# Altium PCB PCB1.PcbDoc (part 1 of 2)
Units mm, origin at the board's own origin, x right, y up, seen from the top; angles counter-clockwise.
Board outline 50.96 x 22.34 mm, 2 copper layers (Top Layer, Bottom Layer), stack 0.771 mm thick; 54 components, 41 nets, 158 pads, 78 vias.
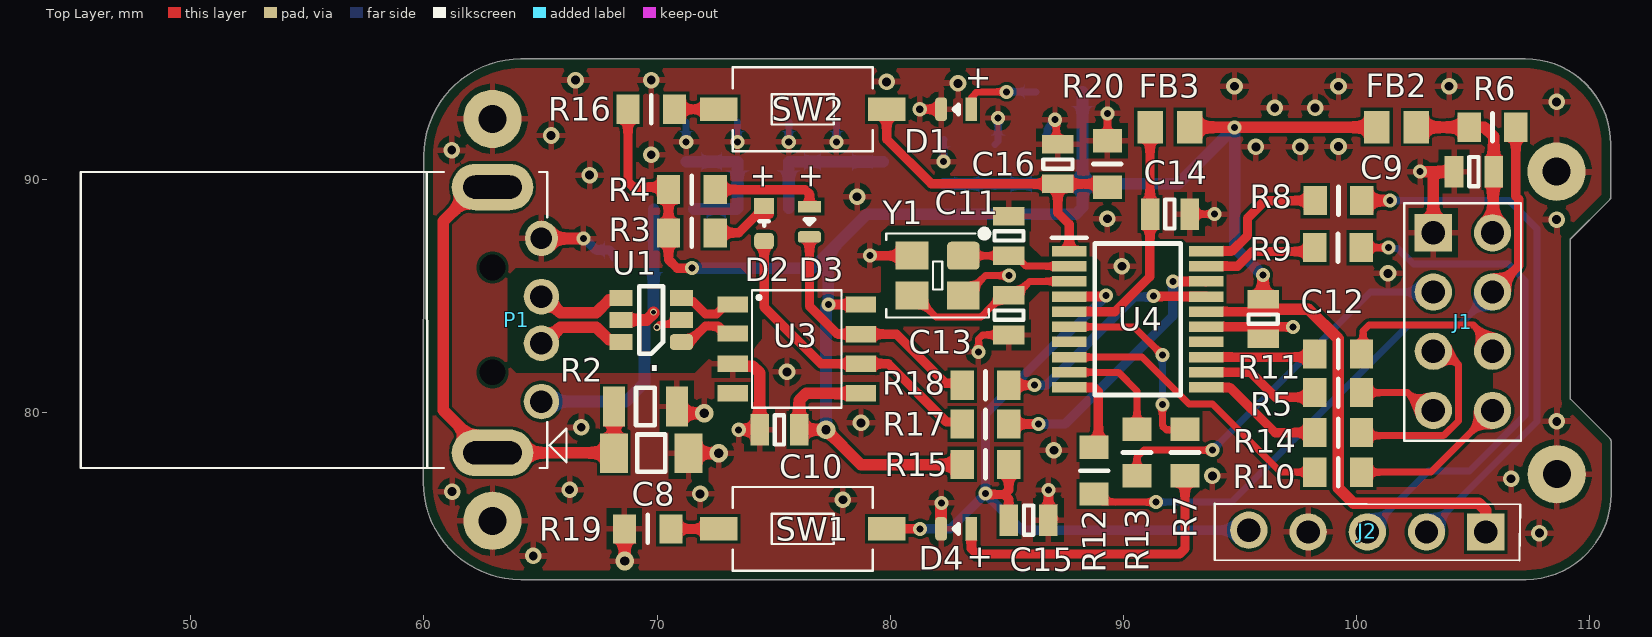
[diagram p0: Top Layer view]
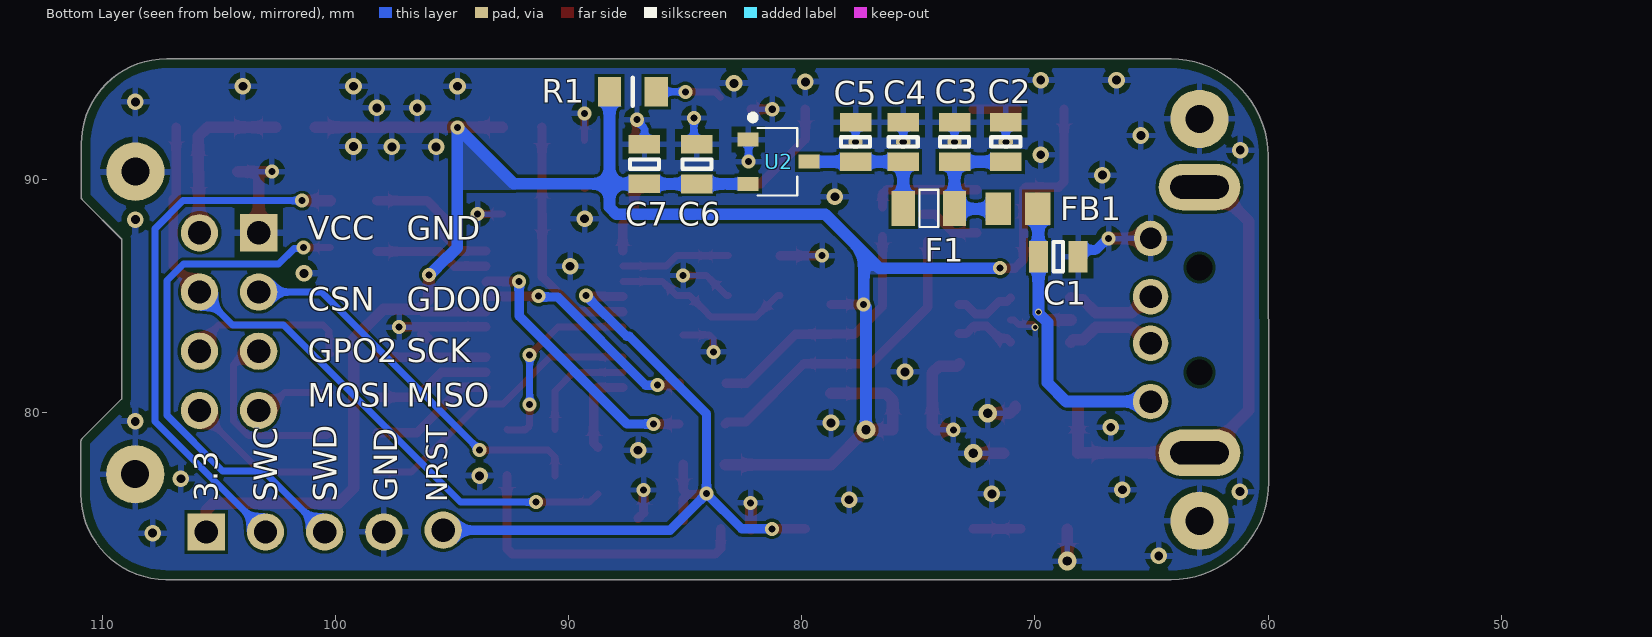
[diagram p1: Bottom Layer view, seen from below]

## Layer stack, top to bottom
Top Solder: solder mask 0.0102, Solder Resist, Dk 3.5
Top Layer: signal copper 0.0356
Dielectric 1: dielectric 0.7, FR-4, Dk 4.5
Bottom Layer: signal copper 0.0356
Bottom Solder: solder mask 0.0102, Solder Resist, Dk 3.5

## Board outline
64.147,72.823 cw(c64.147,77) 59.97,77 60.002,91 cw(c64.167,91) 64.167,95.165 107.247,95.165 cw(c107.247,91.502) 110.911,91.502 110.914,89.238 cw(c110.736,89.238) 110.862,89.113 109.173,87.421 109.181,80.568 110.873,78.879 cw(c110.748,78.754) 110.925,78.754 110.927,76.537 110.931,76.504 cw(c107.253,76.504) 107.292,72.827 107.253,72.823

## Design rules (kind name [scope] priority, off if disabled: settings)
BoardOutlineClearance [All] p1: gap=0.4 ignorepadtopadclearanceinfootprint=FALSE
Clearance Clearance_1 [All] p1: gap=0.127 ignorepadtopadclearanceinfootprint=FALSE
DiffPairsRouting [All] p1: maxlimit=0.254 minlimit=0.127 mostfreqgap=0.127 toplayer_minwidth=0.3 toplayer_maxwidth=0.665 toplayer_prefwidth=0.5 bottomlayer_minwidth=0.3 bottomlayer_maxwidth=0.665 bottomlayer_prefwidth=0.5 maxuncoupledlength=12.7
HoleSize [All] p1: absolutevalues=TRUE maxlimit=6.8 minlimit=0.15 maxpercent=80.000 minpercent=20.000
HoleToHoleClearance HoleToHole_Vias [IsVia vs IsVia] p1: gap=0.2 allowstackedmicrovias=TRUE
HoleToHoleClearance HoleToHole_Pads [All] p2: gap=0.45 allowstackedmicrovias=TRUE
MinimumSolderMaskSliver [All] p1: minsoldermaskwidth=0.1
PolygonConnect [All] p1: connectstyle=Relief reliefconductorwidth=0.254 reliefentries=4 polygonreliefangle="90 Angle" airgapwidth=0.254
RoutingVias [All] p1: holewidth=0.4 width=0.8 viastyle="Through Hole" minholewidth=0.3 minwidth=0.6 maxholewidth=2 maxwidth=4
SilkToSolderMaskClearance [IsPad] p1: minsilkscreentomaskgap=0.1 clearancetoexposedcopper=TRUE
SolderMaskExpansion [All] p1: expansion=0.1 istentingtop=FALSE
SupplyNets "Schematic Supply Nets_3" [InNet('+5V')] p1: voltage=0.000
SupplyNets "Schematic Supply Nets_2" [InNet('+3.3V')] p2: voltage=0.000
SupplyNets "Schematic Supply Nets_1" [InNet('+3.3V_RF')] p3: voltage=0.000
SupplyNets "Schematic Supply Nets" [InNet('GND')] p4: voltage=0.000
Width [All] p1: maxlimit=2 minlimit=0.127 preferedwidth=0.254
25 further rules are at their usual default settings.

## Classes and differential pairs
differential pair D: +D_P -D_N

## Components (designator, comment, footprint, x,y, rotation, side; value= is the part's Value field where it differs from the comment)
C1 "10nF" C_0805 69,86.675 r180 bottom
C2 "0.1 uF" C_0805 71.25,91.6 r90 bottom
C3 "4.7uF" C_0805 73.45,91.6 r90 bottom
C4 "10uF" C_0805 75.65,91.6 r90 bottom
C5 "0.1 uF" C_0805 77.695,91.6 r90 bottom
C6 "0.1 uF" C_0805 84.5,90.647 r90 bottom
C7 "10uF" C_0805 86.75,90.65 r90 bottom
C8 "10nF" C_1206 69.75,78.25 r0 top
C9 "0.1 uF" C_0805 105.04,90.325 r180 top
C10 "0.1 uF" C_0805 75.25,79.25 r180 top
C11 "18pF" C_0805 85.096,87.568 r90 top
C12 "0.1 uF" C_0805 96,84 r90 top
C13 "18pF" C_0805 85.096,84.168 r270 top
C14 "0.1 uF" C_0805 92,88.505 r0 top
C15 "0.1 uF" C_0805 85.938,75.375 r0 top
C16 "0.1 uF" C_0805 87.192,90.65 r90 top
D1 "KT-0603G" D_LED_SMD_0603_GREEN 82.833,93 r180 top
D2 "KT-0603R" D_LED_SMD_0603_RED 74.593,88.1 r270 top
D3 "KT-0603G" D_LED_SMD_0603_GREEN 76.537,88.175 r270 top
D4 "KT-0603Y" D_LED_SMD_0603_YELLOW 82.833,75 r180 top
F1 "SMD0805-050-16V" F_0805 74.55,88.75 r0 bottom
FB1 "BLM21PG601SN1D" FB_0805 70.725,88.725 r0 bottom
FB2 "BLM21PG601SN1D" FB_0805 101.724,92.232 r0 top
FB3 "BLM21PG601SN1D" FB_0805 92,92.232 r180 top
J1 "DS1023-2*4SF11" "СС1101_Header 4X2" 103.3,87.7 r0 top
J2 "BOOMELE(Boom Precision Elec)" SWD_Header_Connector_5pos_Female 105.548,74.868 r0 top
P1 "CONN PLUG USB2.0 TYPEA 4POS R/A" "USB-A (USB TYPE-A)" 65.041,83.962 r270 top
R1 "220R" Res_0805 87.25,93.75 r180 bottom
R2 "1M" RES_1206 69.5,80.25 r0 top
R3 "1k" Res_0805 71.492,87.7 r0 top
R4 "1k" Res_0805 71.492,89.553 r0 top
R5 "47R" Res_0805 99.216,80.843 r180 top
R6 "10k" Res_0805 105.84,92.232 r180 top
R7 "220R" Res_0805 92.645,78.273 r270 top
R8 "100R" Res_0805 99.232,89.083 r0 top
R9 "100R" Res_0805 99.214,87.064 r0 top
R10 "100R" Res_0805 99.216,77.432 r180 top
R11 "47R" Res_0805 99.216,82.5 r0 top
R12 "47R" Res_0805 88.75,77.5 r270 top
R13 "100R" Res_0805 90.589,78.273 r90 top
R14 "47R" Res_0805 99.216,79.129 r0 top
R15 "10k" Res_0805 84.088,77.768 r0 top
R16 "220R" Res_0805 69.75,93 r0 top
R17 "100R" Res_0805 84.088,79.5 r180 top
R18 "100R" Res_0805 84.088,81.162 r180 top
R19 "220R" Res_0805 69.6,75 r180 top
R20 "10k" Res_0805 89.318,90.65 r90 top
SW1 "TSA363G25-250B" "SW_BRIGHT TSA363G25-250B" 76.25,75 r0 top
SW2 "TSA363G25-250B" "SW_BRIGHT TSA363G25-250B" 76.25,93 r0 top
U1 "USBLC6-2SC6" U_SOT23-6-292X160X125-95P-SGMICRO 69.75,83.962 r180 top
U2 "XC6206P332MR-G" SOT-23_XC6206P332MR-G 81,90.75 r270 bottom
U3 "CH340N" U_CH340N_SOP-8 76,82.717 r0 top
U4 "STM32F030F4P6" SOP65P640X120-20N 90.619,83.993 r0 top
Y1 "8MHZ" SMD-3225 82.039,85.868 r180 top

## Footprints (in the part's own frame and the unit in brackets; to place one, negate y for a bottom-side part, rotate by r counter-clockwise, add the part's x,y. Pads: shape width x height; smd on the part's side, far side on the other; paste and mask are expansions set on the pad)
C_0805 [mm]
  rect 0.8x1.35 smd: 1(-0.85,0) 2(0.85,0)
  silkscreen extent -0.2,-0.63 0.2,0.63, body extent -1,-0.63 1,0.63, height 1.8
C_1206 [mm]
  rect 1.2x1.7 smd: 1(-1.6,0) 2(1.6,0)
  silkscreen extent -0.6,-0.8 0.6,0.8, body extent -1.6,-0.8 1.6,0.8, height 2.2
D_LED_SMD_0603_GREEN [mm] "MEIHUA"
  rrect50% 0.5x1 smd: 1(0.65,0)
  rect 0.5x1 smd: 2(-0.65,0)
  silkscreen extent -0.1,-0.2 0.1,0.2, body extent -0.8,-0.4 0.8,0.4, height 0.6
D_LED_SMD_0603_RED [mm] "KT-0603R"
  rrect50% 0.7x0.85 smd: 1(0.75,0)
  rect 0.7x0.85 smd: 2(-0.75,0)
  silkscreen extent -0.1,-0.2 0.1,0.2, body extent -0.8,-0.4 0.8,0.4, height 0.6
D_LED_SMD_0603_YELLOW [mm] "MEIHUA"
  rrect50% 0.5x1 smd: 1(0.65,0)
  rect 0.5x1 smd: 2(-0.65,0)
  silkscreen extent -0.1,-0.2 0.1,0.2, body extent -0.8,-0.4 0.8,0.4, height 0.6
F_0805 [mm] "Fuse 0805"
  rect 1x1.5 smd: 1(-1.1,0) 2(1.1,0)
  silkscreen extent -0.4,-0.8 0.4,0.8, body extent -1.1,-0.77 1.1,0.77, height 0.5
FB_0805 [mm]
  rect 1.1x1.4 smd: 1(-0.85,0) 2(0.85,0)
  body extent -1.03,-0.6 0.97,0.6, height 0.9
Res_0805 [mm]
  rect 1x1.25 smd: 1(-1,0) 2(1,0)
  silkscreen extent 0,-0.6 0,0.6, body extent -1,-0.63 1,0.63, height 0.61
RES_1206 [mm] "Chip resistor 1206"
  rect 0.95x1.7 smd: 1(-1.35,0) 2(1.35,0)
  silkscreen extent -0.4,-0.8 0.4,0.8, body extent -1.6,-0.8 1.6,0.8, height 1
SMD-3225 [mm]
  rrect30% 1.4x1.2 smd: 1(-1.1,-0.85)
  rect 1.4x1.2 smd: 2(1.1,-0.85) 3(1.1,0.85) 4(-1.1,0.85)
  silkscreen extent -2.2,-1.95 2.2,1.8, body extent -1.65,-1.3 1.65,1.3, height 0.81
SOP65P640X120-20N [mm]
  rect 1.475x0.45 smd: 1(-2.938,2.925) 2(-2.938,2.275) 3(-2.938,1.625) 4(-2.938,0.975) 5(-2.938,0.325) 6(-2.938,-0.325) 7(-2.938,-0.975) 8(-2.938,-1.625) 9(-2.938,-2.275) 10(-2.938,-2.925) 11(2.938,-2.925) 12(2.938,-2.275) 13(2.938,-1.625) 14(2.938,-0.975) 15(2.938,-0.325) 16(2.938,0.325) 17(2.938,0.975) 18(2.938,1.625) 19(2.938,2.275) 20(2.938,2.925)
  silkscreen extent -3.67,-3.25 1.85,3.5, body extent -3.2,-3.25 3.2,3.25, height 1
SOT-23_XC6206P332MR-G [mm] "-40℃~+85℃@(Ta) 1 1uA 200mA 3.3V 6V Fixed Over Current Protection Positive SOT-23-3L Voltage Regulators - Linear, Low Drop Out (LDO) Regulators ROHS"
  rect 0.6x0.9 smd: 1(-0.95,-1.3) 2(0.95,-1.3) 3(0,1.3)
  silkscreen extent -2.02,-1.23 1.45,0.8, body extent -1.45,-1.4 1.45,1.4, height 1.3
"SW_BRIGHT TSA363G25-250B" [mm]
  rect 1.6x1 smd: 1(-3.6,0) 2(3.6,0)
  silkscreen extent -3,-1.8 3,1.8, body extent -4,-1.75 4,1.75, height 2.5
SWD_Header_Connector_5pos_Female [mm] "-55℃~+105℃ 1 1x5P 2.54mm 3.2mm 3A 5P 8.5mm Brass Gold Square Hole Through Hole Top 插件,P=2.54mm Female Headers ROHS"
  rect 1.6x1.6 hole 1: 1(0,0)
  round 1.6 hole 1: 2(-2.54,0) 3(-5.08,0) 4(-7.62,0) 5(-10.16,0.076)
  silkscreen extent -11.63,-1.22 1.48,1.22, body extent -11.63,-1.2 1.47,1.2, height 8.5
U_CH340N_SOP-8 [mm] "USB to serial 2Mbps USB 2.0 SOP-8 Interface Controllers RoHS"
  rect 1.3x0.7 smd: 1(-2.75,1.905) 2(-2.75,0.66) 3(-2.75,-0.635) 4(-2.75,-1.905) 5(2.75,-1.905) 6(2.75,-0.635) 7(2.75,0.635) 8(2.75,1.905)
  silkscreen extent -1.93,-2.51 1.91,2.51, body extent -3.1,-2.5 3.1,2.5, height 1.83
U_SOT23-6-292X160X125-95P-SGMICRO [mm]
  rrect50% 0.99x0.69 smd paste+0 mask+0.07: 1(-1.295,0.95)
  rect 0.99x0.69 smd paste+0 mask+0.07: 2(-1.295,0) 3(-1.295,-0.95) 4(1.295,-0.95) 5(1.295,0) 6(1.295,0.95)
  silkscreen extent -0.51,-1.45 0.51,1.45, body extent -1.4,-1.45 1.4,1.45, height 1.45
"USB-A (USB TYPE-A)" [mm] "USB 2.0 Type-A Plug Connector, Through Hole"
  round 1.524 hole 0.965 paste-2539.97 mask+0: 1(3.5,0) 2(1,0) 3(-1,0)
  oval 1.524x1.4 hole 0.92: 4(-3.5,0)
  oval 2x3.5 hole 1 slot 2.5 at 90 deg paste-2539.97: 5(-5.7,-2.1)
  oval 2x3.5 hole 1 slot 2.5 at 90 deg paste-2539.97 mask+0.1: 6(5.7,-2.1)
  round 1 hole 1.1 unplated: NPTH1(-2.25,-2.1) NPTH2(2.25,-2.1)
  silkscreen extent -6.35,-19.76 6.35,1.07, body extent -6.35,-19.77 6.35,0.25, height 3.25
"СС1101_Header 4X2" [mm]
  rect 1.6x1.6 hole 1: 1(0,0)
  round 1.6 hole 1: 2(2.54,0) 3(0,-2.54) 4(2.54,-2.54) 5(0,-5.08) 6(2.54,-5.08) 7(0,-7.62) 8(2.54,-7.62)
  silkscreen extent -1.24,-8.92 3.76,1.27, body extent -1.24,-8.89 3.76,1.27, height 8

## Part data
C1: library part CAP_0805_10nF_50V, "10nF 50V X7R ±10% 0805 Multilayer Ceramic Capacitors MLCC - SMD/SMT ROHS", JLCPCB Part #=C1710, Manufacturer="Samsung Electro-Mechanics", Manufacturer Part Number=CL21B103KBANNNC, Operating Temperature="-55°C ~ 125°C", Tolerance=±10%, Voltage=50V, Buy=https://jlcpcb.com/parts/componentSearch?searchTxt=CL21B103KBANNNC, Capacitance=10nF, Datasheet=https://jlc-prod-smt.oss-eu-central-1.aliyuncs.com/smtDataManualFile/8579706770727755776-C1710.pdf?response-content-disposition=attachment%3B%20filename%3DC1710.pdf%3B%20filename%2A%3DUTF-8%27%27C1710.pdf&x-oss-date=20260516T103022Z&x-oss-expires=3600&x-oss-security-token=CAISgAN1q6Ft5B2yfSjIr5vaeMrfrJUX3o%2B5SkjHs1kgZdgYi%2F3CkDz2IHhMdHJsAOodtv0%2FmmhT6PkclqRLcbhpcmfjV%2BZHzLB8qZRY0WdK4J7b16cNrbH4M4H6aXeirtuwDsz9SNTCALjPD3nPii50x5bjaDymRCbLGJaViJlhHLN1Ow6jdmhpCctxLAlvo9NgFxm3D%2Fu2NQPwiWf9FVdhvhEG6Vly8qOi2MaRmFy8yFTx0b0SvJ%2BjYMrmPctoN9JnSdC5mfdzau3a1TJ84gRD0a5wkaVA1zbDs5bfISEIuUzebreLqY03dV4mOvdqIcMe8qigz88fk%2FfIioH6xyxKOexoSCnFTOiiupCcQLPyao9jLu6iayqViY7QaIOTqQohZmkAMwVOasAsI3Ngh4zF97Qt0cVNkXO9gWfLI8DtuMleWgpi2mxT9tHD0eS19jklBdzSlusJRAJJUVBflCeKEaRNSAd3WGhEfM2%2BBt4QT30w5N2u00S8OSMImqM1DaKWD5sagAFtrX%2BQcdSzDaKnHH8nrsBUq0qcCE2DJ5%2BkN95fLxcL0Vt%2BkNnsFcjqE%2BEPtifwzRvt911yU0VkY4pd6kpF24KmGqu4Lpq1hgj4WHyZrx06wYIsca90fqJlBnQeqgcaD4Y1la%2FB2rshzc48%2BKfWnn4ceIJiIHQyGJTpH94GBdLq7yAA&x-oss-signature-version=OSS4-HMAC-SHA256&x-oss-credential=STS.NXo3pkAJ6iMRHnvWYuiW4d8ir%2F20260516%2Feu-central-1%2Foss%2Faliyun_v4_request&x-oss-signature=7d6dbb44947e0fc4ace7cc8a22af28fe59a5288d9775ab3efac8f1294a53bfcf, Price=0.001
C2 C5 C6 C9 C10 C12 C14 C15 C16: library part CAP_0805_0.1uF_50V, "100nF 50V X7R ±10% 0805 Multilayer Ceramic Capacitors MLCC - SMD/SMT ROHS", JLCPCB Part #=C49678, Manufacturer=YAGEO, Manufacturer Part Number=CC0805KRX7R9BB104, Operating Temperature="-55°C ~ 125°C", Tolerance=±10%, Voltage=50V, Buy=https://jlcpcb.com/partdetail/YAGEO-CC0805KRX7R9BB104/C49678, Capacitance="0.1 uF", Datasheet=https://jlc-prod-smt.oss-eu-central-1.aliyuncs.com/smtDataManualFile/8579706882459549696-C49678.pdf?response-content-disposition=attachment%3B%20filename%3DC49678.pdf%3B%20filename%2A%3DUTF-8%27%27C49678.pdf&x-oss-date=20260509T150721Z&x-oss-expires=1800&x-oss-security-token=CAISgAN1q6Ft5B2yfSjIr5nkGYnNhLZvhrS4W2jLh0gPVttigaOfpDz2IHhMdHJsAOodtv0%2FmmhT6PkclqRLcbhpcmfjV%2BZHzLB8qZ4w4QlJ4J7b16cNrbH4M4H6aXeirtuwDsz9SNTCALjPD3nPii50x5bjaDymRCbLGJaViJlhHLN1Ow6jdmhpCctxLAlvo9NgFxm3D%2Fu2NQPwiWf9FVdhvhEG6Vly8qOi2MaRmFy8yFTx0b0SvJ%2BjYMrmPctoN9JnSdC5mfdzau3a1TJ84gRD0a5wkaVA1zbDs5bfISEIuUzebreLqY03dV4mOvdqIcMe8qigz88fk%2FfIioH6xyxKOexoSCnFTOiiupCcQLPyao9jLu6iayqViY7QaIOTqQohZmkAMwVOasAsI3Ngh4zF97Qt0cVNkXO9gWfLI8DtuMleWgqn2M4LknSgc5lCkRRYwGs1287ugXlSQzo890KPDAEovaKCnZ2ZSfh7Y4sNknI6i%2Bfc2Se2MIkIXBjWNKKWD5sagAFxRuEDT0b5Uh11V0T%2B6WGprICyVq2L2pzc8W3n1hdCj7c4Zzbg%2B%2Bvq6%2FokmhkUMujPV9QS28qoM538cmu41YYRFXZhWAYUTNatPQ9jF8HMGoQm0L8BBLnI4geUNT6NnOZxGbP36uNu2Bwjd808DD1q7CDJzQRm13JFFXN7J7hyuyAA&x-oss-signature-version=OSS4-HMAC-SHA256&x-oss-credential=STS.NZQR3yiiN1vSYNzcHZZTNnf4F%2F20260509%2Feu-central-1%2Foss%2Faliyun_v4_request&x-oss-signature=2d3eb2fd27914fee3250aab324e9ec2b05844d5181f8ba6f3f171dd79494e103, Price=0.0052
C3: library part CAP_0805_4,7uF_25V, "25V 4.7uF X5R ±10% 0805 Multilayer Ceramic Capacitors MLCC - SMD/SMT ROHS", JLCPCB Part #=C1779, Manufacturer="Samsung Electro-Mechanics", Manufacturer Part Number=CL21A475KAQNNNE, Operating Temperature="-55°C ~ 125°C", Tolerance=±10%, Voltage=25V, Buy=https://jlcpcb.com/partdetail/2131-CL21A475KAQNNNE/C1779, Capacitance=4.7uF, Datasheet=https://jlc-prod-smt.oss-eu-central-1.aliyuncs.com/smtDataManualFile/8556213325551206400-C1779.pdf?response-content-disposition=attachment%3B%20filename%3DC1779.pdf%3B%20filename%2A%3DUTF-8%27%27C1779.pdf&x-oss-date=20260516T104329Z&x-oss-expires=1800&x-oss-security-token=CAISgAN1q6Ft5B2yfSjIr5vaeMrfrJUX3o%2B5SkjHs1kgZdgYi%2F3CkDz2IHhMdHJsAOodtv0%2FmmhT6PkclqRLcbhpcmfjV%2BZHzLB8qZRY0WdK4J7b16cNrbH4M4H6aXeirtuwDsz9SNTCALjPD3nPii50x5bjaDymRCbLGJaViJlhHLN1Ow6jdmhpCctxLAlvo9NgFxm3D%2Fu2NQPwiWf9FVdhvhEG6Vly8qOi2MaRmFy8yFTx0b0SvJ%2BjYMrmPctoN9JnSdC5mfdzau3a1TJ84gRD0a5wkaVA1zbDs5bfISEIuUzebreLqY03dV4mOvdqIcMe8qigz88fk%2FfIioH6xyxKOexoSCnFTOiiupCcQLPyao9jLu6iayqViY7QaIOTqQohZmkAMwVOasAsI3Ngh4zF97Qt0cVNkXO9gWfLI8DtuMleWgpi2mxT9tHD0eS19jklBdzSlusJRAJJUVBflCeKEaRNSAd3WGhEfM2%2BBt4QT30w5N2u00S8OSMImqM1DaKWD5sagAFtrX%2BQcdSzDaKnHH8nrsBUq0qcCE2DJ5%2BkN95fLxcL0Vt%2BkNnsFcjqE%2BEPtifwzRvt911yU0VkY4pd6kpF24KmGqu4Lpq1hgj4WHyZrx06wYIsca90fqJlBnQeqgcaD4Y1la%2FB2rshzc48%2BKfWnn4ceIJiIHQyGJTpH94GBdLq7yAA&x-oss-signature-version=OSS4-HMAC-SHA256&x-oss-credential=STS.NXo3pkAJ6iMRHnvWYuiW4d8ir%2F20260516%2Feu-central-1%2Foss%2Faliyun_v4_request&x-oss-signature=9f61833a188db84a55c29013e2c004927f6acdf35e29b1585cbd84fa40073969, Price=0.02
C4 C7: library part CAP_0805_10uF_25V, "10uF 25V X5R ±10% 0805 Multilayer Ceramic Capacitors MLCC - SMD/SMT ROHS", JLCPCB Part #=C15850, Manufacturer="Samsung Electro-Mechanics", Manufacturer Part Number=СL21A106KAYNNNE, Tolerance=±10%, Voltage=25V, Buy=https://jlcpcb.com/partdetail/16532-CL21A106KAYNNNE/C15850, Capacitance=10uF, Datasheet=https://jlc-prod-smt.oss-eu-central-1.aliyuncs.com/smtDataManualFile/8579706853607202816-C15850.pdf?response-content-disposition=attachment%3B%20filename%3DC15850.pdf%3B%20filename%2A%3DUTF-8%27%27C15850.pdf&x-oss-date=20260509T151036Z&x-oss-expires=1800&x-oss-security-token=CAISgAN1q6Ft5B2yfSjIr5nkGYnNhLZvhrS4W2jLh0gPVttigaOfpDz2IHhMdHJsAOodtv0%2FmmhT6PkclqRLcbhpcmfjV%2BZHzLB8qZ4w4QlJ4J7b16cNrbH4M4H6aXeirtuwDsz9SNTCALjPD3nPii50x5bjaDymRCbLGJaViJlhHLN1Ow6jdmhpCctxLAlvo9NgFxm3D%2Fu2NQPwiWf9FVdhvhEG6Vly8qOi2MaRmFy8yFTx0b0SvJ%2BjYMrmPctoN9JnSdC5mfdzau3a1TJ84gRD0a5wkaVA1zbDs5bfISEIuUzebreLqY03dV4mOvdqIcMe8qigz88fk%2FfIioH6xyxKOexoSCnFTOiiupCcQLPyao9jLu6iayqViY7QaIOTqQohZmkAMwVOasAsI3Ngh4zF97Qt0cVNkXO9gWfLI8DtuMleWgqn2M4LknSgc5lCkRRYwGs1287ugXlSQzo890KPDAEovaKCnZ2ZSfh7Y4sNknI6i%2Bfc2Se2MIkIXBjWNKKWD5sagAFxRuEDT0b5Uh11V0T%2B6WGprICyVq2L2pzc8W3n1hdCj7c4Zzbg%2B%2Bvq6%2FokmhkUMujPV9QS28qoM538cmu41YYRFXZhWAYUTNatPQ9jF8HMGoQm0L8BBLnI4geUNT6NnOZxGbP36uNu2Bwjd808DD1q7CDJzQRm13JFFXN7J7hyuyAA&x-oss-signature-version=OSS4-HMAC-SHA256&x-oss-credential=STS.NZQR3yiiN1vSYNzcHZZTNnf4F%2F20260509%2Feu-central-1%2Foss%2Faliyun_v4_request&x-oss-signature=8762d278c26d245834c42214802b622d568facef5eaf104528c82ef48575f4d7, Price=0.0206
C8: library part CAP_1206_10nF_1kV, "10nF 1kV X7R ±10% 1206 Multilayer Ceramic Capacitors MLCC - SMD/SMT ROHS", Manufacturer=YAGEO, Manufacturer Part Number=CC1206KKX7RCBB103, Tolerance=±10%, Voltage=1kV, Buy=https://jlcpcb.com/partdetail/YAGEO-CC1206KKX7RCBB103/C107192, Capacitance=10nF, Datasheet=https://jlc-prod-smt.oss-eu-central-1.aliyuncs.com/smtDataManualFile/8588898775960604672-C107192.pdf?response-content-disposition=attachment%3B%20filename%3DC107192.pdf%3B%20filename%2A%3DUTF-8%27%27C107192.pdf&x-oss-date=20260515T153829Z&x-oss-expires=1800&x-oss-security-token=CAISgAN1q6Ft5B2yfSjIr5mMB4PVjKgZ4fW9OkHll2knP8xIm7H4tjz2IHhMdHJsAOodtv0%2FmmhT6PkclqRLcbhpcmfjV%2BZHzLB8qdQuxAZL4J7b16cNrbH4M4H6aXeirtuwDsz9SNTCALjPD3nPii50x5bjaDymRCbLGJaViJlhHLN1Ow6jdmhpCctxLAlvo9NgFxm3D%2Fu2NQPwiWf9FVdhvhEG6Vly8qOi2MaRmFy8yFTx0b0SvJ%2BjYMrmPctoN9JnSdC5mfdzau3a1TJ84gRD0a5wkaVA1zbDs5bfISEIuUzebreLqY03dV4mOvdqIcMe8qigz88fk%2FfIioH6xyxKOexoSCnFTOiiupCcQLPyao9jLu6iayqViY7QaIOTqQohZmkAMwVOasAsI3Ngh4zF97Qt0cVNkXO9gWfLI8DtuMleWiqi0ftD0nSgc5lCkRRYwGs1287ugXlSQzo890KPDAEovaKCnZ2ZSfh7Y4sNknI6i%2Bfc2Se2MIkIrARuxqKWD5sagAGXMGno1m6L4zwv0njDR%2F0HRp9ow4Y4x8QcjMq9N7YqoYBrHJpHJYsEaiCr3qhSsKLHkdXj9Vlk78sLtQiy8gWIje8awxFU%2BC3AspX2kgtMmJ20PKz9JZy2Qm00CRPYlleuj6%2F%2FLE0QzgLRbKqFn4uX4vDJu01KcbSz%2BKSxX8yGbSAA&x-oss-signature-version=OSS4-HMAC-SHA256&x-oss-credential=STS.NZ9L9aaw8V7V8gTsir3CdttST%2F20260515%2Feu-central-1%2Foss%2Faliyun_v4_request&x-oss-signature=5ecb38cf75a5561c3a9b6bf6466710af050279b3acf6ce69789d2ec44f3fa05e, DIGIKEY Part #=C15850, Price=$0.02
C11 C13: library part CAP_0805_12pF_50V, "18pF 50V NP0 ±5% 0805 Multilayer Ceramic Capacitors MLCC - SMD/SMT ROHS", JLCPCB Part #=C113825, Manufacturer=YAGEO, Manufacturer Part Number=CC0805JRNPO9BN180, Tolerance=±5%, Voltage=50V, Buy=https://jlcpcb.com/partdetail/YAGEO-CC0805JRNPO9BN180/C113825, Capacitance=18pF, Datasheet=https://jlc-prod-smt.oss-eu-central-1.aliyuncs.com/smtDataManualFile/8588898964644618241-C113825.pdf?response-content-disposition=attachment%3B%20filename%3DC113825.pdf%3B%20filename%2A%3DUTF-8%27%27C113825.pdf&x-oss-date=20260516T212811Z&x-oss-expires=1800&x-oss-security-token=CAISgAN1q6Ft5B2yfSjIr5nhKYn3qrIX%2F7a8SH6EtEJsQf12uKvcqTz2IHhMdHJsAOodtv0%2FmmhT6PkclqRLcbhpcmfjV%2BZHzLB8qZNqxHpK4J7b16cNrbH4M4H6aXeirtuwDsz9SNTCALjPD3nPii50x5bjaDymRCbLGJaViJlhHLN1Ow6jdmhpCctxLAlvo9NgFxm3D%2Fu2NQPwiWf9FVdhvhEG6Vly8qOi2MaRmFy8yFTx0b0SvJ%2BjYMrmPctoN9JnSdC5mfdzau3a1TJ84gRD0a5wkaVA1zbDs5bfISEIuUzebreLqY03dV4mOvdqIcMe8qigz88fk%2FfIioH6xyxKOexoSCnFTOiiupCcQLPyao9jLu6iayqViY7QaIOTqQohZmkAMwVOasAsI3Ngh4zF97Qt0cVNkXO9gWfLI8DtuMleWgrs1cdUUnSgc5lCkRRYwGs1287ugXlSQzo890KPDAEovaKCnZ2ZSfh7Y4sNknI6i%2Bfc2Se2MIkIrky2qqKWD5sagAE2TN7bZYnfq1G28rGZN9rYKSRv2UxwpPVx%2BBHOgQ6QQ0TaY4e5uZTACMtYiebmRwq0AqnJKHt0VfT9B1zngVZ6hyQUodjPXmYYN%2FSsdgGx3fJhxSFDSQRHAFkXHFTBMIBhYvj80OkzGioFjPVYTaPSFpxhrB4wfU0Et%2BUM7S38myAA&x-oss-signature-version=OSS4-HMAC-SHA256&x-oss-credential=STS.NZTb3CGm6HtWJX5PB9MrZWnwK%2F20260516%2Feu-central-1%2Foss%2Faliyun_v4_request&x-oss-signature=4da326ff6e52d5d8e27f020e835db201b924b0b6db1095e7d895517c8be22f64, Price=$0.01
D1 D3: library part LED_SMD_0603_GREEN, "-40℃~+85℃ 100mW 120° 3.1V 430mcd 513nm~528nm 525nm 5mA Discrete Diode Emerald Green Water Clear 0603 LED Indication - Discrete ROHS", Current="20 мА", JLCPCB Part #=C12624, Manufacturer="Hubei KENTO Elec", Operating Temperature=-40℃~+85℃, Buy=https://jlcpcb.com/partdetail/Hubei_KENTOElec-KT0603G/C12624, Datasheet=https://jlcpcb.com/api/file/downloadByFileSystemAccessId/8586172557489397760, Manufacturer Part Number=KT-0603G, Price=0,00504
D2: library part LED_SMD_0603_RED, "-40℃~+85℃ 1.8V~2.4V 120° 20mA 300mcd 40mW 615nm~630nm 645nm Discrete Diode Red Water Clear 0603 LED Indication - Discrete ROHS", Current=20mA, JLCPCB Part #=C2286, Manufacturer="Hubei KENTO Elec KT-0603R", Operating Temperature=-40℃~+85℃, Buy=https://www.lcsc.com/product-detail/C2286.html?s_z=n_q_KT-0603R&spm=wm.fly.bg.0.xh&lcsc_vid=T1QIBFNURQBeXgdVQ1ULUAUHFFJZVwJfQlBWAwdSFlkxVlNRT1JaUVxRQVdXVzsOAxUeFF5JWBYZEEoKFBINSQcJGk4eFQsCAgIaSgADAwAHC0slRVNXV0oOAwwC, Datasheet=https://www.lcsc.com/datasheet/C2286.pdf?spm=wm.sxq.inf.ggs___wm.fly.bg.0.xh&lcsc_vid=T1QIBFNURQBeXgdVQ1ULUAUHFFJZVwJfQlBWAwdSFlkxVlNRT1JaUVxRQVdXVzsOAxUeFF5JWBYZEEoKFBINSQcJGk4eFQsCAgIaSgADAwAHC0slRVNXV0oOAwwC, Manufacturer Part Number=KT-0603R, Price=0.0067
D4: library part LED_SMD_0603_YELLOW, "-40℃~+85℃ 120° 175mcd 2.4V 40mW 584nm~594nm 596nm Discrete Diode Water Clear Yellow 0603 LED Indication - Discrete ROHS", Current=20mA, JLCPCB Part #=C2287, Manufacturer="Hubei KENTO Elec", Operating Temperature=-40℃~+85℃, Buy=https://jlcpcb.com/partdetail/Hubei_KENTOElec-KT0603Y/C2287, Datasheet=https://jlc-prod-smt.oss-eu-central-1.aliyuncs.com/smtDataManualFile/8579710580753817600-C2287.pdf?response-content-disposition=attachment%3B%20filename%3DC2287.pdf%3B%20filename%2A%3DUTF-8%27%27C2287.pdf&x-oss-date=20260516T144217Z&x-oss-expires=1800&x-oss-security-token=CAISgAN1q6Ft5B2yfSjIr5vcfs7cvK9Fjo%2BeO1%2FJgTINR8h%2Fu53qoTz2IHhMdHJsAOodtv0%2FmmhT6PkclqRLcbhpcmfjV%2BZHzLB8qdxnim5K4J7b16cNrbH4M4H6aXeirtuwDsz9SNTCALjPD3nPii50x5bjaDymRCbLGJaViJlhHLN1Ow6jdmhpCctxLAlvo9NgFxm3D%2Fu2NQPwiWf9FVdhvhEG6Vly8qOi2MaRmFy8yFTx0b0SvJ%2BjYMrmPctoN9JnSdC5mfdzau3a1TJ84gRD0a5wkaVA1zbDs5bfISEIuUzebreLqY03dV4mOvdqIcMe8qigz88fk%2FfIioH6xyxKOexoSCnFTOiiupCcQLPyao9jLu6iayqViY7QaIOTqQohZmkAMwVOasAsI3Ngh4zF97Qt0cVNkXO9gWfLI8DtuMleWirjQllH9tHD0eS19jklBdzSlusJRAJJUVBflCeKEaRNSAd3WGhEfM2%2BBt4QT30w5N2u00S8OSMIOSR0JqKWD5sagAEUGr99Qqm2bQ%2BzemWWRS2Reh2egmGihFfALn2Z%2BHVaD1ahLSCx5b8dflk5UGxw6fI95ylrReONTBXgoFkOt8s5xvnLF0PWLPw8gVCxolGf6iIstOk5W5SbB4BerOx7OzmLCqAfXRA%2BLSQFivqZNepRlqRWvuXMuB1UGoKM9RrukSAA&x-oss-signature-version=OSS4-HMAC-SHA256&x-oss-credential=STS.NXi5thQpd9Mu9yxe2XKGSTXAC%2F20260516%2Feu-central-1%2Foss%2Faliyun_v4_request&x-oss-signature=998421f771e27d3595c8b7d42cac8ef66a94fa8d8f2bc569b8496a5e0bfa6030, Manufacturer Part Number=KT-0603Y, Price=0,01
F1: library part F_SMD0805-050-16V, "-40℃~+85℃ 100A 150mΩ 16V 1A 500mA 500mW 850mΩ 8s 0805 Resettable Fuses ROHS", Current=500mA, JLCPCB Part #=C2833485, Manufacturer=TECHFUSE, Operating Temperature=-40℃~+85℃, Buy=https://jlcpcb.com/partdetail/TECHFUSE-SMD0805_05016V/C2833485, Created by=Levyk, Datasheet=https://jlc-prod-smt.oss-eu-central-1.aliyuncs.com/smtDataManualFile/8588920139651952640-C2833485.pdf?response-content-disposition=attachment%3B%20filename%3DC2833485.pdf%3B%20filename%2A%3DUTF-8%27%27C2833485.pdf&x-oss-date=20260516T115745Z&x-oss-expires=1800&x-oss-security-token=CAISgAN1q6Ft5B2yfSjIr5rnH%2FjxtYoZ0PagUE7U13InWrlOopTNuDz2IHhMdHJsAOodtv0%2FmmhT6PkclqRLcbhpcmfjV%2BZHzLB8qeEfqGVK4J7b16cNrbH4M4H6aXeirtuwDsz9SNTCALjPD3nPii50x5bjaDymRCbLGJaViJlhHLN1Ow6jdmhpCctxLAlvo9NgFxm3D%2Fu2NQPwiWf9FVdhvhEG6Vly8qOi2MaRmFy8yFTx0b0SvJ%2BjYMrmPctoN9JnSdC5mfdzau3a1TJ84gRD0a5wkaVA1zbDs5bfISEIuUzebreLqY03dV4mOvdqIcMe8qigz88fk%2FfIioH6xyxKOexoSCnFTOiiupCcQLPyao9jLu6iayqViY7QaIOTqQohZmkAMwVOasAsI3Ngh4zF97Qt0cVNkXO9gWfLI8DtuMleWhqHVJt5JAPyAFpORa%2Bb5wchMHn6pr9EWOXuJZUIn3b%2FstWNupKq5ldctHSeoXq108CXVnU5PXYITCPp1qKWD5sagAECeKXzsy5%2Ftj3DsHJbcy1yaHSVzfAH%2FPUAlhRATnF0Z7Pflx0Jv4Z%2B%2F2tRuXZY0CP3fs4%2BLgiDuGGDMKaTKn5I0VqbiEql0brxxXLSlF8gK2VFe2R%2BglB5MBTatMDnSrY2CHn0NmCSY0rKYioEUR8NlA7EvF%2FDEk9LeQkeCViF7CAA&x-oss-signature-version=OSS4-HMAC-SHA256&x-oss-credential=STS.NYRTBEXU8g4KRhe3rrV6bMQfZ%2F20260516%2Feu-central-1%2Foss%2Faliyun_v4_request&x-oss-signature=9784e19f5cd66b73fc71320ac989f91eea64c3a441157ea6c412178b48383b5b, Manufacturer Part Number=SMD0805-050-16V, Price=0.05
FB1: library part FB_0805_220Om_100Mhz_2A, "220Ω@100MHz 2A 45mΩ ±25% 0805 Ferrite Beads ROHS", JLCPCB Part #=C85840, Manufacturer="Murata Electronics", Operating Temperature="-55°C до +125°C", Tolerance=±25%, Buy=https://jlcpcb.com/partdetail/MurataElectronics-BLM21PG221SN1D/C85840, Datasheet=https://jlc-prod-smt.oss-eu-central-1.aliyuncs.com/smtDataManualFile/8588884139214835712-C85840.pdf?response-content-disposition=attachment%3B%20filename%3DC85840.pdf%3B%20filename%2A%3DUTF-8%27%27C85840.pdf&x-oss-date=20260516T101344Z&x-oss-expires=1800&x-oss-security-token=CAISgAN1q6Ft5B2yfSjIr5nTIMiDv7cV9fWKcGjrnDYsQMx0l6bBrjz2IHhMdHJsAOodtv0%2FmmhT6PkclqRLcbhpcmfjV%2BZHzLB8qcxxm2ZK4J7b16cNrbH4M4H6aXeirtuwDsz9SNTCALjPD3nPii50x5bjaDymRCbLGJaViJlhHLN1Ow6jdmhpCctxLAlvo9NgFxm3D%2Fu2NQPwiWf9FVdhvhEG6Vly8qOi2MaRmFy8yFTx0b0SvJ%2BjYMrmPctoN9JnSdC5mfdzau3a1TJ84gRD0a5wkaVA1zbDs5bfISEIuUzebreLqY03dV4mOvdqIcMe8qigz88fk%2FfIioH6xyxKOexoSCnFTOiiupCcQLPyao9jLu6iayqViY7QaIOTqQohZmkAMwVOasAsI3Ngh4zF97Qt0cVNkXO9gWfLI8DtuMleWqrjSHtD9tHD0eS19jklBdzSlusJRAJJUVBflCeKEaRNSAd3WGhEfM2%2BBt4QT30w5N2u00S8OSMIFPFMJaKWD5sagAFljYUd8q8o9KnmgqBYhJR8bauKeTxRKkksZ1oQRvfaor7b5Qk2S2BJKJzuCfd54TboWlBXbsGron9McDl1aQsrGtxzu8NeByfiGTgNbFDmW8YfqceVuHt2JPckapnAS44xDw3kYdn11iqJTTxlzYKc04nXQo2u%2B8XDSfZTtgrKECAA&x-oss-signature-version=OSS4-HMAC-SHA256&x-oss-credential=STS.NZfkr7Rh4B7arNZx6yLCXxcjL%2F20260516%2Feu-central-1%2Foss%2Faliyun_v4_request&x-oss-signature=5c0abef27528d92d78074502b6a119fe4fd2a3fc20196d870f82a1f93d0d24fb, Manufacturer Part Number=BLM21PG601SN1D, Price=0.03
FB2 FB3: library part "FB_0805_600Om_100Mhz_1.4 А", "FERRITE BEAD SMD 0805INCH 600OHM", Manufacturer="Murata Electronics", Operating Temperature="-55°C до +125°C", Tolerance=±25%, Buy=https://www.digikey.com/en/products/detail/murata-electronics/BLM21PG601SN1D/24763118, Datasheet=https://pim.murata.com/asset/pim4/ferriteBeadInductortypefilter/ENFA0005_PDF_FERRITEBEADINDUCTORTYPEFILTER?lastModifiedDatetime=20260105172120, Manufacturer Part Number=BLM21PG601SN1D, Price=0.11, Y=C337884
J1: library part SPI_Header_Connector_6pos, "Female Header 8 Position 2.54mm Pitch Dual Row Through Hole", JLCPCB Part #=C92271, Manufacturer="CONNFLY Elec", Operating Temperature=-40℃~+105℃, Buy=https://www.lcsc.com/product-detail/C92271.html?s_z=n_q_p_2.54mm%25202x4%2520Pin%2520Header&spm=wm.ssy.bg.10.xh&lcsc_vid=T1QIBFNURQBeXgdVQ1ULUAUHFFJZVwJfQlBWAwdSFlkxVlNRT1JbUVRRT1JWVjsOAxUeFF5JWBYZEEoKFBINSQcJGk4dAgUUFAk%3D, Datasheet=https://www.lcsc.com/datasheet/C92271.pdf?spm=wm.sxq.inf.ggs___wm.ssy.bg.10.xh&lcsc_vid=T1QIBFNURQBeXgdVQ1ULUAUHFFJZVwJfQlBWAwdSFlkxVlNRT1JbUVRRT1JWVjsOAxUeFF5JWBYZEEoKFBINSQcJGk4dAgUUFAk%3D, Manufacturer Part Number=DS1023-2*4SF11, Price=0.1144
J2: library part SWD_Header_Connector_5pos_Female, "-55℃~+105℃ 1 1x5P 2.54mm 3.2mm 3A 5P 8.5mm Brass Gold Square Hole Through Hole Top 插件,P=2.54mm Female Headers ROHS", JLCPCB Part #=C50950, Manufacturer Part Number=2.54-1*5PFemale, Operating Temperature=-55℃~+105℃, Buy=https://jlcpcb.com/partdetail/51962-2_54_15PFemale/C50950, Datasheet=https://jlc-prod-smt.oss-eu-central-1.aliyuncs.com/smtDataManualFile/8580086807658356736-C50950.pdf?response-content-disposition=attachment%3B%20filename%3DC50950.pdf%3B%20filename%2A%3DUTF-8%27%27C50950.pdf&x-oss-date=20260510T081856Z&x-oss-expires=1800&x-oss-security-token=CAISgAN1q6Ft5B2yfSjIr5nwPonflOl5wIyaY2rbqUg0ObpFvrLGmDz2IHhMdHJsAOodtv0%2FmmhT6PkclqRLcbhpcmfjV%2BZHzLB8qaxviWtI4J7b16cNrbH4M4H6aXeirtuwDsz9SNTCALjPD3nPii50x5bjaDymRCbLGJaViJlhHLN1Ow6jdmhpCctxLAlvo9NgFxm3D%2Fu2NQPwiWf9FVdhvhEG6Vly8qOi2MaRmFy8yFTx0b0SvJ%2BjYMrmPctoN9JnSdC5mfdzau3a1TJ84gRD0a5wkaVA1zbDs5bfISEIuUzebreLqY03dV4mOvdqIcMe8qigz88fk%2FfIioH6xyxKOexoSCnFTOiiupCcQLPyao9jLu6iayqViY7QaIOTqQohZmkAMwVOasAsI3Ngh4zF97Qt0cVNkXO9gWfLI8DtuMleWsrjQWlr1tHD0eS19jklBdzSlusJRAJJUVBflCeKEaRNSAd3WGhEfM2%2BBt4QT30w5N2u00S8OSMIs%2FS6e6KWD5sagAE%2BiFVykRfW2tQekuHA5ahpUzP5oyBTr9IBdto8Qgy%2BhkcQ0NRBq4%2B2C%2BcCj0L2K4ituQKTyF1ZhtSmouhFsCr34oLIh7%2FoF4vH9Tt7oy5m8rnzeIoQKYOCrtKU%2FLpzP%2FWghas%2Bnfi0G6tkKXhzT2BcEo4vzPFX8pXS6t1mYzR3FiAA&x-oss-signature-version=OSS4-HMAC-SHA256&x-oss-credential=STS.NZEu3ky6XwNqaLjMHa55iQwmz%2F20260510%2Feu-central-1%2Foss%2Faliyun_v4_request&x-oss-signature=ebd2c911cbe9f78ff672c5eb86a4865a2cccce09b62fa1e750ba389953452c4a, Manufacturer="BOOMELE(Boom Precision Elec)", Price=0.08
P1: library part USB-A_R/A_4P, "USB-A (USB TYPE-A) USB 2.0 Plug Connector 4 Position Through Hole, Right Angle", Manufacturer=Molex, Operating Temperature=-25℃~+85℃, Voltage=5V, Buy=https://www.digikey.com/en/products/detail/molex/0480370001/857603?s=N4IgTCBcDaIAwBYAccDMB2OWCMIC6AvkA, Datasheet=https://www.molex.com/content/dam/molex/molex-dot-com/products/automated/en-us/salesdrawingpdf/480/48037/480370001_sd.pdf?inline, Manufacturer Part Number="CONN PLUG USB2.0 TYPEA 4POS R/A", Price=1.37, UKR_BUY=http://www.kosmodrom.com.ua/el.php?name=SMDUSB-3.1Type-CFemale6P
R1 R7 R16 R19: library part RES_0805_220R_5%, "-55℃~+155℃ 125mW 150V 220Ω Thick Film Resistor ±100ppm/℃ ±5% 0805 Chip Resistor - Surface Mount ROHS", JLCPCB Part #=C114742, Manufacturer=YAGEO, Manufacturer Part Number=RC0805JR-07220RL, Operating Temperature="-55°C ~ 155°C", Tolerance=±5%, Buy=https://jlcpcb.com/partdetail/YAGEO-RC0805JR07220RL/C114742, Datasheet=https://jlc-prod-smt.oss-eu-central-1.aliyuncs.com/smtDataManualFile/8588899007158894592-C114742.pdf?response-content-disposition=attachment%3B%20filename%3DC114742.pdf%3B%20filename%2A%3DUTF-8%27%27C114742.pdf&x-oss-date=20260515T161429Z&x-oss-expires=1800&x-oss-security-token=CAISgAN1q6Ft5B2yfSjIr5vdJvfyr4dtxYS4W0PZ1WMDa9p7m5PyiDz2IHhMdHJsAOodtv0%2FmmhT6PkclqRLcbhpcmfjV%2BZHzLB8qdN%2BkgRL4J7b16cNrbH4M4H6aXeirtuwDsz9SNTCALjPD3nPii50x5bjaDymRCbLGJaViJlhHLN1Ow6jdmhpCctxLAlvo9NgFxm3D%2Fu2NQPwiWf9FVdhvhEG6Vly8qOi2MaRmFy8yFTx0b0SvJ%2BjYMrmPctoN9JnSdC5mfdzau3a1TJ84gRD0a5wkaVA1zbDs5bfISEIuUzebreLqY03dV4mOvdqIcMe8qigz88fk%2FfIioH6xyxKOexoSCnFTOiiupCcQLPyao9jLu6iayqViY7QaIOTqQohZmkAMwVOasAsI3Ngh4zF97Qt0cVNkXO9gWfLI8DtuMleWirsUNwj0nSgc5lCkRRYwGs1287ugXlSQzo890KPDAEovaKCnZ2ZSfh7Y4sNknI6i%2Bfc2Se2MIkI0Sfp7aKWD5sagAFOTVqDFkuSZqC%2B9F8xQE9axcgZkmEzu7ZYtuZYN2cyDqQhNctKCKGjCOollESlyN%2B6DUBadYaHbcSkaocdFPVnNPkjTzj0vJC0Y17weW7RmosQVmq361WMbeedPJcQbRsD4DBBqrzYcrydVFffDI6Ga0Os8UQzy0%2FYUesAdvqtryAA&x-oss-signature-version=OSS4-HMAC-SHA256&x-oss-credential=STS.NXhmMFBXLrFSYeh1cVgUWtVYj%2F20260515%2Feu-central-1%2Foss%2Faliyun_v4_request&x-oss-signature=239cf029c17fc0b3b32f26ebe8c16135fafa0e0597091fca6665a68f92df0ae3, Price=0.0026, Resistance=220R
R2: library part RES_1206_1M_1%, "-55℃~+155℃ 1MΩ 250mW 500V Thick Film Resistor ±1% ±100ppm/℃ 1206 Chip Resistor - Surface Mount ROHS", JLCPCB Part #=C414805, Manufacturer=UNI-ROYAL, Manufacturer Part Number=HV06W4F1004T5E, Operating Temperature=-55℃~+155℃, Tolerance=±1%, Buy=https://jlcpcb.com/partdetail/406995-HV06W4F1004T5E/C414805, Datasheet=https://jlc-prod-smt.oss-eu-central-1.aliyuncs.com/smtDataManualFile/8590903911412805632-C414805.pdf?response-content-disposition=attachment%3B%20filename%3DC414805.pdf%3B%20filename%2A%3DUTF-8%27%27C414805.pdf&x-oss-date=20260515T170544Z&x-oss-expires=1800&x-oss-security-token=CAISgAN1q6Ft5B2yfSjIr5vbeu7hpad3x%2FS9OmTWt0M%2Fdr5624TeoDz2IHhMdHJsAOodtv0%2FmmhT6PkclqRLcbhpcmfjV%2BZHzLB8qeAn6QVL4J7b16cNrbH4M4H6aXeirtuwDsz9SNTCALjPD3nPii50x5bjaDymRCbLGJaViJlhHLN1Ow6jdmhpCctxLAlvo9NgFxm3D%2Fu2NQPwiWf9FVdhvhEG6Vly8qOi2MaRmFy8yFTx0b0SvJ%2BjYMrmPctoN9JnSdC5mfdzau3a1TJ84gRD0a5wkaVA1zbDs5bfISEIuUzebreLqY03dV4mOvdqIcMe8qigz88fk%2FfIioH6xyxKOexoSCnFTOiiupCcQLPyao9jLu6iayqViY7QaIOTqQohZmkAMwVOasAsI3Ngh4zF97Qt0cVNkXO9gWfLI8DtuMleWhrDFcdJttHD0eS19jklBdzSlusJRAJJUVBflCeKEaRNSAd3WGhEfM2%2BBt4QT30w5N2u00S8OSMI%2FnlawKKWD5sagAENn2jZOcHXopOvA2UdCVpm2if%2BOhaj7OhxOKSN4SvhpOXzdS7ah2Y86ihpTpG5rIoLiSBfGDV91OM82PNtQ9P1EkbvnTs3LUJzoLVm%2B%2BG0cv567FSNHXJG5A8aSPcoA6oVQtNCHhBzwpXaZ6YxPLF73qSFskUNRePaQpF5Y9tjEyAA&x-oss-signature-version=OSS4-HMAC-SHA256&x-oss-credential=STS.NXn1TUHxVp6V8BgSCjz1V4AuB%2F20260515%2Feu-central-1%2Foss%2Faliyun_v4_request&x-oss-signature=3dcd14a040366e9d26eb4774cc035000f204460e86dfe8d70b49ba26763e2d32, Price=0.001, Resistance=1M
R3 R4: library part RES_0805_1k_1%, "-55℃~+155℃ 125mW 150V 1kΩ Thick Film Resistor ±1% ±100ppm/℃ 0805 Chip Resistor - Surface Mount ROHS", JLCPCB Part #=C17513, Manufacturer="UNI-ROYAL(Uniroyal Elec)", Manufacturer Part Number=0805W8F1001T5E, Operating Temperature="-55°C ~ 155°C", Tolerance=±1%, Buy=https://jlcpcb.com/partdetail/18201-0805W8F1001T5E/C17513, Datasheet=https://jlcpcb.com/api/file/downloadByFileSystemAccessId/8579706499683172352, Price=0.0030, Resistance=1k
R5 R11 R12 R14: library part RES_0805_47R_1%, "-55℃~+155℃ 125mW 150V 47Ω Thick Film Resistor ±1% ±100ppm/℃ 0805 Chip Resistor - Surface Mount ROHS", JLCPCB Part #=C17714, Manufacturer="UNI-ROYAL(Uniroyal Elec)", Manufacturer Part Number=0805W8F470JT5E, Operating Temperature="-55°C ~ 155°C", Tolerance=±1%, Buy=https://jlcpcb.com/parts/componentSearch?searchTxt=0805%2047R%201%25, Datasheet=https://jlc-prod-smt.oss-eu-central-1.aliyuncs.com/smtDataManualFile/8579706603649417216-C17714.pdf?response-content-disposition=attachment%3B%20filename%3DC17714.pdf%3B%20filename%2A%3DUTF-8%27%27C17714.pdf&x-oss-date=20260528T163422Z&x-oss-expires=3600&x-oss-security-token=CAISgAN1q6Ft5B2yfSjIr5vXDevsjq0Y3KyET2OAoG0PbvdcqabegDz2IHhMdHJsAOodtv0%2FmmhT6PkclqRLcbhpcmfjV%2BZHzLB8qZY10x9P4J7b16cNrbH4M4H6aXeirtuwDsz9SNTCALjPD3nPii50x5bjaDymRCbLGJaViJlhHLN1Ow6jdmhpCctxLAlvo9NgFxm3D%2Fu2NQPwiWf9FVdhvhEG6Vly8qOi2MaRmFy8yFTx0b0SvJ%2BjYMrmPctoN9JnSdC5mfdzau3a1TJ84gRD0a5wkaVA1zbDs5bfISEIuUzebreLqY03dV4mOvdqIcMe8qigz88fk%2FfIioH6xyxKOexoSCnFTOiiupCcQLPyao9jLu6iayqViY7QaIOTqQohZmkAMwVOasAsI3Ngh4zF97Qt0cVNkXO9gWfLI8DtuMleWgpmz9wv8nSgc5lCkRRYwGs1287ugXlSQzo890KPDAEovaKCnZ2ZSfh7Y4sNknI6i%2Bfc2Se2MIkIO2xHHaKWD5sagAEE%2Bs%2FHIvGIVCNnLILdAHWLSnNyHJ3ZJTqNXUvKD7QAKqd0c8JfdtIjz%2Fi4O%2FtKQFmH61wHwh1kvst6d240Bgf9tpOBBG8VD9wd6P5rSC7cfM9qnDxMaBIApXaIGlGm9VrQdrigIuQywBhdXuOR0HizuVIkzQUHzn29HZ0FLCGGfiAA&x-oss-signature-version=OSS4-HMAC-SHA256&x-oss-credential=STS.NXbFQXcr9knoME1DmZbxpFcub%2F20260528%2Feu-central-1%2Foss%2Faliyun_v4_request&x-oss-signature=ee800802156ea026b88a63e0301d9005f27d0110a3cc3f08c0d81abddc78824e, Price=0.0023, Resistance=47R
R6 R15 R20: library part RES_0805_10k_1%, "-55℃~+155℃ 10kΩ 125mW 150V Thick Film Resistor ±1% ±100ppm/℃ 0805 Chip Resistor - Surface Mount ROHS", JLCPCB Part #=C17414, Manufacturer="UNI-ROYAL(Uniroyal Elec)", Manufacturer Part Number=0805W8F1001T5E, Operating Temperature="-55°C ~ 155°C", Tolerance=±1%, Buy=https://jlcpcb.com/partdetail/18102-0805W8F1002T5E/C17414, Datasheet=https://jlc-prod-smt.oss-eu-central-1.aliyuncs.com/smtDataManualFile/8562006748392685568-C17414.pdf?response-content-disposition=attachment%3B%20filename%3DC17414.pdf%3B%20filename%2A%3DUTF-8%27%27C17414.pdf&x-oss-date=20260509T145826Z&x-oss-expires=1800&x-oss-security-token=CAISgAN1q6Ft5B2yfSjIr5nkGYnNhLZvhrS4W2jLh0gPVttigaOfpDz2IHhMdHJsAOodtv0%2FmmhT6PkclqRLcbhpcmfjV%2BZHzLB8qZ4w4QlJ4J7b16cNrbH4M4H6aXeirtuwDsz9SNTCALjPD3nPii50x5bjaDymRCbLGJaViJlhHLN1Ow6jdmhpCctxLAlvo9NgFxm3D%2Fu2NQPwiWf9FVdhvhEG6Vly8qOi2MaRmFy8yFTx0b0SvJ%2BjYMrmPctoN9JnSdC5mfdzau3a1TJ84gRD0a5wkaVA1zbDs5bfISEIuUzebreLqY03dV4mOvdqIcMe8qigz88fk%2FfIioH6xyxKOexoSCnFTOiiupCcQLPyao9jLu6iayqViY7QaIOTqQohZmkAMwVOasAsI3Ngh4zF97Qt0cVNkXO9gWfLI8DtuMleWgqn2M4LknSgc5lCkRRYwGs1287ugXlSQzo890KPDAEovaKCnZ2ZSfh7Y4sNknI6i%2Bfc2Se2MIkIXBjWNKKWD5sagAFxRuEDT0b5Uh11V0T%2B6WGprICyVq2L2pzc8W3n1hdCj7c4Zzbg%2B%2Bvq6%2FokmhkUMujPV9QS28qoM538cmu41YYRFXZhWAYUTNatPQ9jF8HMGoQm0L8BBLnI4geUNT6NnOZxGbP36uNu2Bwjd808DD1q7CDJzQRm13JFFXN7J7hyuyAA&x-oss-signature-version=OSS4-HMAC-SHA256&x-oss-credential=STS.NZQR3yiiN1vSYNzcHZZTNnf4F%2F20260509%2Feu-central-1%2Foss%2Faliyun_v4_request&x-oss-signature=fc7b88699953cfa2c0f2014bdf97acf83a90f23f6501d5e2d258ec1f5c0deb6d, Price=0.0030, Resistance=10k
R8 R9 R10 R13 R17 R18: library part RES_0805_100R_1%, "-55℃~+155℃ 100Ω 125mW 150V Thick Film Resistor ±1% ±100ppm/℃ 0805 Chip Resistor - Surface Mount ROHS", JLCPCB Part #=C17414, Manufacturer="UNI-ROYAL(Uniroyal Elec)", Manufacturer Part Number=0805W8F1000T5E, Operating Temperature="-55°C ~ 155°C", Tolerance=±1%, Buy=https://jlcpcb.com/partdetail/18096-0805W8F1000T5E/C17408, Datasheet=https://jlc-prod-smt.oss-eu-central-1.aliyuncs.com/smtDataManualFile/8562006687172894720-C17408.pdf?response-content-disposition=attachment%3B%20filename%3DC17408.pdf%3B%20filename%2A%3DUTF-8%27%27C17408.pdf&x-oss-date=20260509T150132Z&x-oss-expires=1800&x-oss-security-token=CAISgAN1q6Ft5B2yfSjIr5nkGYnNhLZvhrS4W2jLh0gPVttigaOfpDz2IHhMdHJsAOodtv0%2FmmhT6PkclqRLcbhpcmfjV%2BZHzLB8qZ4w4QlJ4J7b16cNrbH4M4H6aXeirtuwDsz9SNTCALjPD3nPii50x5bjaDymRCbLGJaViJlhHLN1Ow6jdmhpCctxLAlvo9NgFxm3D%2Fu2NQPwiWf9FVdhvhEG6Vly8qOi2MaRmFy8yFTx0b0SvJ%2BjYMrmPctoN9JnSdC5mfdzau3a1TJ84gRD0a5wkaVA1zbDs5bfISEIuUzebreLqY03dV4mOvdqIcMe8qigz88fk%2FfIioH6xyxKOexoSCnFTOiiupCcQLPyao9jLu6iayqViY7QaIOTqQohZmkAMwVOasAsI3Ngh4zF97Qt0cVNkXO9gWfLI8DtuMleWgqn2M4LknSgc5lCkRRYwGs1287ugXlSQzo890KPDAEovaKCnZ2ZSfh7Y4sNknI6i%2Bfc2Se2MIkIXBjWNKKWD5sagAFxRuEDT0b5Uh11V0T%2B6WGprICyVq2L2pzc8W3n1hdCj7c4Zzbg%2B%2Bvq6%2FokmhkUMujPV9QS28qoM538cmu41YYRFXZhWAYUTNatPQ9jF8HMGoQm0L8BBLnI4geUNT6NnOZxGbP36uNu2Bwjd808DD1q7CDJzQRm13JFFXN7J7hyuyAA&x-oss-signature-version=OSS4-HMAC-SHA256&x-oss-credential=STS.NZQR3yiiN1vSYNzcHZZTNnf4F%2F20260509%2Feu-central-1%2Foss%2Faliyun_v4_request&x-oss-signature=8388af8eb95401cf4c318d209d6eb35ec576c31ca5c84fef56141475e5cae2cb, Price=0.0023, Resistance=100R
SW1 SW2: library part "SW_BRIGHT TSA363G25-250B", "Tactile Switch SPST 250gf 2.5mm Gull Wing 6.05mm x 3.6mm Surface Mount", JLCPCB Part #=C354943, Manufacturer=G-Switch, Buy=https://www.lcsc.com/product-detail/C354943.html, Datasheet=https://www.lcsc.com/datasheet/C354943.pdf?spm=wm.sxq.inf.ggs&lcsc_vid=T1QIBFNURQBeXgdVQ1ULUAUHFFJZVwJfQlBWAwdSFlkxVlNRT1JcUVNXRVVbUDsOAxUeFF5JWAUbBA8CAgIFAAtIFA4DSA%3D%3D, Manufacturer Part Number=TSA363G25-250B, Price=0.0535
U1: library part U_USBLC6-2SC6_SOT-23-6, "-55℃~+125℃ 0.35pF、0.8pF 100nA 150W 15V 5V 6A 9V ESD IEC 61000-4-2、IEC 61000-4-5、IEC 61000-4-4 SOT-23-6 ESD and Surge Protection (TVS/ESD) ROHS", JLCPCB Part #=C5250994, Manufacturer=TWGMC, Operating Temperature=-55℃~+125℃, Buy=https://jlcpcb.com/partdetail/TWGMC-USBLC62SC6/C5250994, Created by=Levyk, Datasheet=https://jlc-prod-smt.oss-eu-central-1.aliyuncs.com/smtDataManualFile/8590456194797240320-C5250994.pdf?response-content-disposition=attachment%3B%20filename%3DC5250994.pdf%3B%20filename%2A%3DUTF-8%27%27C5250994.pdf&x-oss-date=20260515T173051Z&x-oss-expires=1800&x-oss-security-token=CAISgAN1q6Ft5B2yfSjIr5vbeu7hpad3x%2FS9OmTWt0M%2Fdr5624TeoDz2IHhMdHJsAOodtv0%2FmmhT6PkclqRLcbhpcmfjV%2BZHzLB8qeAn6QVL4J7b16cNrbH4M4H6aXeirtuwDsz9SNTCALjPD3nPii50x5bjaDymRCbLGJaViJlhHLN1Ow6jdmhpCctxLAlvo9NgFxm3D%2Fu2NQPwiWf9FVdhvhEG6Vly8qOi2MaRmFy8yFTx0b0SvJ%2BjYMrmPctoN9JnSdC5mfdzau3a1TJ84gRD0a5wkaVA1zbDs5bfISEIuUzebreLqY03dV4mOvdqIcMe8qigz88fk%2FfIioH6xyxKOexoSCnFTOiiupCcQLPyao9jLu6iayqViY7QaIOTqQohZmkAMwVOasAsI3Ngh4zF97Qt0cVNkXO9gWfLI8DtuMleWhrDFcdJttHD0eS19jklBdzSlusJRAJJUVBflCeKEaRNSAd3WGhEfM2%2BBt4QT30w5N2u00S8OSMI%2FnlawKKWD5sagAENn2jZOcHXopOvA2UdCVpm2if%2BOhaj7OhxOKSN4SvhpOXzdS7ah2Y86ihpTpG5rIoLiSBfGDV91OM82PNtQ9P1EkbvnTs3LUJzoLVm%2B%2BG0cv567FSNHXJG5A8aSPcoA6oVQtNCHhBzwpXaZ6YxPLF73qSFskUNRePaQpF5Y9tjEyAA&x-oss-signature-version=OSS4-HMAC-SHA256&x-oss-credential=STS.NXn1TUHxVp6V8BgSCjz1V4AuB%2F20260515%2Feu-central-1%2Foss%2Faliyun_v4_request&x-oss-signature=54f63629e5fd49da0cd74065c2f652e4ba60deb824488a1a018b1aee82f621a4, Manufacturer Part Number=USBLC6-2SC6, Price=0.0914
U2: library part U_AXC6206P332MR-G_SOT-23-3L, "-40℃~+85℃@(Ta) 1 1uA 200mA 3.3V 6V Fixed Over Current Protection Positive SOT-23-3L Voltage Regulators - Linear, Low Drop Out (LDO) Regulators ROHS", JLCPCB Part #=C5446, Manufacturer="Torex Semicon", Operating Temperature=-40℃~+85℃, Buy=https://jlcpcb.com/partdetail/TorexSemicon-XC6206P332MRG/C5446, Created by=Levyk, Datasheet=https://jlc-prod-smt.oss-eu-central-1.aliyuncs.com/smtDataManualFile/8579707861616033792-C5446.pdf?response-content-disposition=attachment%3B%20filename%3DC5446.pdf%3B%20filename%2A%3DUTF-8%27%27C5446.pdf&x-oss-date=20260516T134046Z&x-oss-expires=1800&x-oss-security-token=CAISgAN1q6Ft5B2yfSjIr5r%2BMYLa1ZUTxoayMHzQjFElSORviobNpTz2IHhMdHJsAOodtv0%2FmmhT6PkclqRLcbhpcmfjV%2BZHzLB8qbMPvGhK4J7b16cNrbH4M4H6aXeirtuwDsz9SNTCALjPD3nPii50x5bjaDymRCbLGJaViJlhHLN1Ow6jdmhpCctxLAlvo9NgFxm3D%2Fu2NQPwiWf9FVdhvhEG6Vly8qOi2MaRmFy8yFTx0b0SvJ%2BjYMrmPctoN9JnSdC5mfdzau3a1TJ84gRD0a5wkaVA1zbDs5bfISEIuUzebreLqY03dV4mOvdqIcMe8qigz88fk%2FfIioH6xyxKOexoSCnFTOiiupCcQLPyao9jLu6iayqViY7QaIOTqQohZmkAMwVOasAsI3Ngh4zF97Qt0cVNkXO9gWfLI8DtuMleWkrMdO1%2BTepqaIWzHOTEFupYY7CDV2HC3D82fcxJ2B%2Bmz7zwy%2B%2Fdqxot7SHZVvl3SE4LlO17v1wI%2B4IdwaKWD5sagAFVzeN1W4KwQWFoGVlUn0CJH381EZYL0GoGYO1OEYfjoPAoSeX8SH4yxbTvmcZJX4ueolQZTCO7jWkGLxXSXplCYTEyNO%2BM35BTPfOU2oKlaC07q8pdSWwMUfmUp0HrkBp%2B%2BnVXDl6X3edaMlNV5cC0EX7QCZam9kvrTOQqsIsoBSAA&x-oss-signature-version=OSS4-HMAC-SHA256&x-oss-credential=STS.NYKz8n8J2qDY2ZahQpDkCeCfG%2F20260516%2Feu-central-1%2Foss%2Faliyun_v4_request&x-oss-signature=2126f870e66d577ef35741291968c17a4291c0a7bacddad3aa32a9f618e75a9a, Manufacturer Part Number=XC6206P332MR-G, Price=0.11
U3: library part U_CH340N_SOP-8, "USB to serial 2Mbps USB 2.0 SOP-8 Interface Controllers RoHS", LCSC Part=C2977777, Manufacturer_Name="WCH CH340N", Operating Temperature=-20℃~+70℃, Datasheet Link=https://www.lcsc.com/datasheet/C2977777.pdf?spm=wm.sxq.inf.ggs___wm.fly.bg.0.xh&lcsc_vid=T1QIBFNURQBeXgdVQ1ULUAUHFFJZVwJfQlBWAwdSFlkxVlNRT1JaUFBRRFleUzsOAxUeFF5JWBYZEEoKFBINSQcJGk4dAgUUFAk%3D, LCSC  Price/Stock=https://www.lcsc.com/product-detail/C2977777.html?s_z=n_q_%28CH340N%29&spm=wm.fly.bg.0.xh&lcsc_vid=T1QIBFNURQBeXgdVQ1ULUAUHFFJZVwJfQlBWAwdSFlkxVlNRT1JaUFBRRFleUzsOAxUeFF5JWBYZEEoKFBINSQcJGk4dAgUUFAk%3D, Manufacturer_Part_Number=CH340N, USB Protocol="USB 2.0"
U4: library part U_STM32F030F4P6, "32-Bit MCU Cortex-M0 16KB Flash TSSOP20 STM32F030F4P6, 32 bit ARM Cortex M0 Microcontroller 48MHz 16 kB Flash, 4 kB RAM, I2C 20-Pin TSSOP", Manufacturer_Name=STMicroelectronics, Mouser Part Number=511-STM32F030F4P6, Arrow Part Number=STM32F030F4P6, Arrow Price/Stock=https://www.arrow.com/en/products/stm32f030f4p6/stmicroelectronics?utm_currency=USD&region=nac, Datasheet Link=https://www.st.com/resource/en/datasheet/stm32f030f4.pdf, Geometry.Height=1.2mm, Manufacturer_Part_Number=STM32F030F4P6, Mouser Price/Stock=https://www.mouser.co.uk/ProductDetail/STMicroelectronics/STM32F030F4P6?qs=eyrSuY1LhL02tVhJ92aI6g%3D%3D
Y1: library part Y_YSX321SL_8MHZ_SMD-3225, "-40℃~+85℃ 12pF 150Ω 8MHz Crystal Oscillator ±10ppm ±20ppm SMD3225-4P Crystals ROHS", JLCPCB Part #=C2682775, Manufacturer="YXC Crystal Oscillators", Manufacturer Part Number=X32258MOB4SI, Operating Temperature=-40℃~+85℃, Buy=https://jlcpcb.com/partdetail/2777872-X32258MOB4SI/C2682775, Datasheet=https://jlc-prod-smt.oss-eu-central-1.aliyuncs.com/smtDataManualFile/8588893491909316608-C2682775.pdf?response-content-disposition=attachment%3B%20filename%3DC2682775.pdf%3B%20filename%2A%3DUTF-8%27%27C2682775.pdf&x-oss-date=20260516T205024Z&x-oss-expires=1800&x-oss-security-token=CAISgAN1q6Ft5B2yfSjIr5vYf8L1h7xV8IaeaUPr1WcHTuhpmoDC1Dz2IHhMdHJsAOodtv0%2FmmhT6PkclqRLcbhpcmfjV%2BZHzLB8qbETjnVK4J7b16cNrbH4M4H6aXeirtuwDsz9SNTCALjPD3nPii50x5bjaDymRCbLGJaViJlhHLN1Ow6jdmhpCctxLAlvo9NgFxm3D%2Fu2NQPwiWf9FVdhvhEG6Vly8qOi2MaRmFy8yFTx0b0SvJ%2BjYMrmPctoN9JnSdC5mfdzau3a1TJ84gRD0a5wkaVA1zbDs5bfISEIuUzebreLqY03dV4mOvdqIcMe8qigz88fk%2FfIioH6xyxKOexoSCnFTOiiupCcQLPyao9jLu6iayqViY7QaIOTqQohZmkAMwVOasAsI3Ngh4zF97Qt0cVNkXO9gWfLI8DtuMleWkqoR%2BFkUnSgc5lCkRRYwGs1287ugXlSQzo890KPDAEovaKCnZ2ZSfh7Y4sNknI6i%2Bfc2Se2MIkI1fvVDKKWD5sagAEDlD95d6X3pVOMFq8nNEwHtMxFV7k3d45L1BKVcyvLsV9abAjgdiQUQF8NPnTQMlfsf0cglWPjEN9xZaT9VZe7Vouqz0U8YoE4Im9eZQosI3kMl%2BpNRQlmabSxS1jcJc1VFqE%2F3RzF%2Fw0B8ngSHU25erq8wu8214O85kVZzHJORiAA&x-oss-signature-version=OSS4-HMAC-SHA256&x-oss-credential=STS.NXm4xAjctGDukeZ1gRBgEuEi6%2F20260516%2Feu-central-1%2Foss%2Faliyun_v4_request&x-oss-signature=d772babc194132640d5e613440b535b0b14a6364ecccef92fb905cf2699075bc, Frequency=8MHZ, Price=0.18

## Free pads (board coordinates)
  round 2.5 hole 1.2: 2(62.941,75.345) 2(62.941,92.587) 2(108.588,90.325) 2(108.595,77.345)

## Via types
v1: diameter 0.711, hole 0.381, Top Layer to Bottom Layer, 35 vias
v2: diameter 0.6, hole 0.3, Top Layer to Bottom Layer, 23 vias
v3: diameter 0.61, hole 0.305, Top Layer to Bottom Layer, 14 vias
v4: diameter 0.8, hole 0.4, Top Layer to Bottom Layer, 4 vias
v5: diameter 0.305, hole 0.2, Top Layer to Bottom Layer, 2 vias

## Nets (pads, with @x,y where several pads share a name; then routed paths per layer and width w, separated by ;. In a path a pad name is that pad's centre, name@x,y a point inside that pad or via, vN(x,y) a via of type N, cw(c..) or ccw(c..) an arc to the next point about the centre after c; other vN are vias at no path point)
+3.3V: C6.1 C7.1 C10.1 C12.2 FB2.1 FB3.1 J2.1 R1.1 R3.1 R4.1 R15.1 R16.1 U2.2 U3.5 U3.8 U4.16 | length 103
  Top Layer w0.4: R16.1 68.75,89.896 68.984,89.662 70.383,89.662 R4.1 R3.1 70.492,86.553 70.863,86.182 v2(71.489,86.182) ; v2(77.347,84.633) 77.352,84.628 78.745,84.628 U3.8 ; U4.16 96.275,84.318
  Top Layer w0.5: U3.5 76.393,80.812 76.1,80.519 C10.1 v4(77.25,79.25) 78.75,77.75 R15.1@83.283,77.75 ; FB3.1 94.772,92.232 v2(94.779,92.224) ; v2@94.779,92.232 FB2.1 ; v2(95.994,85.9) 95.997,85.897 95.997,84.853 96.4,84.45 ; 96.378,84.427 97.947,84.427 99.216,83.158 99.216,76.754 99.875,76.095 105.256,76.095 105.548,75.802 J2.1
  Bottom Layer w0.5: v2(71.489,86.182) 76.682,86.182 77.347,86.847 ; v4(77.25,79.25) 77.25,84.51 77.347,84.606 77.347,86.847 ; U2.2 C6.1@84.498,89.8 ; C6.1 84.501,89.799 C7.1 ; C7.1 88.25,89.8 ; R1.1 88.25,89.8 ; v2(95.994,85.9) 95.967,85.9 95.241,86.626 95.217,86.626 94.779,87.064 v2(94.779,92.224) 92.356,89.8 88.25,89.8 ; 77.347,86.847 79,88.5 87.957,88.5 88.25,88.793 88.25,89.8
+3.3V_RF: C9.1 FB2.2 J1.2 R6.2 | length 7.6
  Top Layer w0.5: FB2.2 R6.2 105.49,92.232 105.89,91.832 C9.1 105.865,90.3 105.865,87.725 J1.2
+5V: C4.1 C5.1 F1.2 U2.3 | length 6
  Bottom Layer w0.5: F1.2 C4.1 C5.1 U2.3
BOOT0: C16.1 R20.1 SW2.2 U4.1 | length 14.5
  Top Layer w0.4: SW2.2 79.85,91.719 81.769,89.8 C16.1 87.192,88.558 87.681,88.069 U4.1 ; C16.1@87.368,89.8 89.168,89.8 R20.1
CC_GDO0: J1.3 R13.1 | length 16.5
  Top Layer w0.3: R13.1 90.589,78.083 90.884,78.378 v2(93.83,78.378)
  Bottom Layer w0.3: v2(93.83,78.378) 100.613,85.16 J1.3
CC_GPO2: J1.8 R10.1 | length 6.7
  Top Layer w0.3: R10.1 103.192,77.432 J1.8
D_N: P1.2 U1.1 U1.6 U3.2 | length 6.6
  Top Layer w0.381: U1.1 71.199,83.166 71.539,83.166 72.08,83.708 72.62,83.708 72.95,83.378 U3.2
  Top Layer w0.5: P1.2 65.16,82.962 65.846,83.648 67.395,83.648 67.937,83.107 68.36,83.107 U1.6
D_P: P1.3 U1.3 U1.4 U3.1 | length 6.6
  Top Layer w0.381: U1.3 71.199,84.757 71.539,84.757 72.08,84.216 72.543,84.216 72.95,84.622 U3.1
  Top Layer w0.5: P1.3 65.16,84.962 65.846,84.275 67.395,84.275 67.937,84.817 68.36,84.817 U1.4
Debug_LED: R7.1 U4.6 | length 8.6
  Top Layer w0.3: U4.6 90.463,83.668 v2(91.672,82.458) ; v2(91.672,80.331) 91.672,79.426 91.848,79.25 92.621,79.25 R7.1
  Bottom Layer w0.3: v2(91.672,80.331) v2(91.672,82.458)
GND: C1.2 C2.2 C3.2 C4.2 C5.2 C6.2 C7.2 C8.2 C9.2 C10.2 C11.2 C12.1 C13.2 C14.2 C15.2 C16.2 D1.1 D4.1 J1.1 J2.4 P1.4 pad.2 R2.2 R19.2 R20.2 U1.2 U2.1 U3.3 U4.15 Y1.2 Y1.4 | length 41.6
  Top Layer w0.3: R19.2 R19.2@68.61,74.99 ; v5(69.992,83.648) 69.994,83.648 70.112,83.767 70.7,83.767 70.895,83.962 U1.2 ; Y1.4 83.239,85.018 84.089,85.868 v2(85.088,85.868) ; v2(83.786,82.593) 83.795,82.602 83.795,83.142 83.971,83.318 C13.2 ; v3(87.07,92.554) 87.07,92.47 87.133,92.407 87.133,91.559 C16.2 ; R20.2 89.322,91.654 v3(89.322,92.825) ; C14.2 v2(93.908,88.505)
  Top Layer w0.4: v2(79.132,86.718) Y1.2 ; v3(81.267,93) D1.1 ; v2(86.788,76.668) 86.788,75.703 86.78,75.695 C15.2@87.025,75.45 ; U4.15 97.26,83.668 v2(97.277,83.652) v2@97.223,83.652 ; C12.1@96.191,83.341 C12.1 96.114,83.15 C12.1@96.314,83.35 ; J2.4@97.604,74.868 J2.4
  Top Layer w0.5: P1.4 65.045,87.458 66.836,87.458 v3(66.84,87.454) ; v4(68.61,73.623) R19.2@68.61,74.99 ; R2.2 70.85,80.182 71.075,79.957 v4(72.03,79.957) ; C8.2 v4(72.65,78.25) ; U3.3 73.35,81.982 74.107,81.982 74.4,81.689 74.4,79.4 74.25,79.25 v3(73.5,79.25) ; D4.1 82.183,76.102 v3(82.197,76.116) ; v3(102.734,90.325) 103.476,90.325 ; J1.1 103.3,90.149 103.476,90.325 ; C9.2 103.476,90.325
  Bottom Layer w0.3: v3(71.25,91.6) C2.2 ; v3(73.45,91.6) C3.2 ; v3(75.65,91.6) C4.2 ; v3(77.695,91.6) C5.2 ; v3(82.283,90.757) 82.283,91.683 U2.1 ; C6.2 84.627,91.625 v3(84.627,92.627) ; C7.2 86.746,91.504 86.746,92.177 87.07,92.502 v3(87.07,92.554)
  Bottom Layer w0.4: v3(66.84,87.454) 66.896,87.454 67.384,86.966 67.95,86.966 68.15,86.766 C1.2
  other v1: 64.691,73.841 107.85,74.815 77.973,76.25 71.85,76.5 61.207,76.595 66.25,76.678 106.64,77.15 93.821,77.273 87.025,78.375 66.75,79.36 78.75,79.549 108.595,79.614 75.573,81.732 101.355,85.96 89.943,86.268 108.588,88.269 89.318,88.305 78.585,89.25 67.107,90.178 69.75,91.048 61.191,91.247 95.69,91.386 97.587,91.386 99.232,91.405 65.455,91.874 96.5,93.059 98.232,93.059 108.588,93.315 94.772,93.989 99.232,93.989 103.978,93.989 82.911,94.11 79.85,94.177 66.5,94.25 69.75,94.25
NetC1_1: C1.1 FB1.1 P1.1 U1.5 | length 13.9
  Top Layer w0.5: U1.5 69.557,83.962 69.85,84.255 v5(69.85,84.3)
  Bottom Layer w0.5: P1.1 68.658,80.462 69.463,81.267 69.463,83.868 69.85,84.255 C1.1 69.862,86.687 69.862,88.712 FB1.1@69.865,88.715
NetC2_1: C2.1 C3.1 F1.1 FB1.2 | length 6.1
  Bottom Layer w0.5: C2.1 C3.1 F1.1 73.425,88.725 FB1.2
NetC8_1: C8.1 P1.5 P1.6 R2.1 | length 20.9
  Top Layer w0.5: P1.5 62.292,89.662 60.829,88.199 60.829,80.084 62.651,78.262 P1.6 68.138,78.262 C8.1 R2.1
NetC14_1: C14.1 FB3.2 U4.5 | length 10.5
  Top Layer w0.4: U4.5 89.638,84.318 91.14,85.819 91.14,88.5 91.145,88.505 91.145,92.226 FB3.2
NetD1_2: D1.2 R1.2 | length 2.9
  Top Layer w0.3: 83.483,93.5 83.733,93.75 v2(85,93.75)
  Bottom Layer w0.3: v2(85,93.75) R1.2
NetD2_2: D2.2 R3.2 | length 2.7
  Top Layer w0.4: R3.2 73.5,87.7 74.3,88.5 74.814,88.5
NetD3_2: D3.2 R4.2 | length 4.7